# Altium PCB auto_threader.PcbDoc (part 2 of 2)
Units mil, origin at the board's own origin, x right, y up, seen from the top; angles counter-clockwise.
Board outline 1320 x 1690 mil, 4 copper layers (Signal 1, Ground, Power, Signal 2), stack 23.756 mil thick; 26 components, 26 nets, 116 pads, 98 vias.
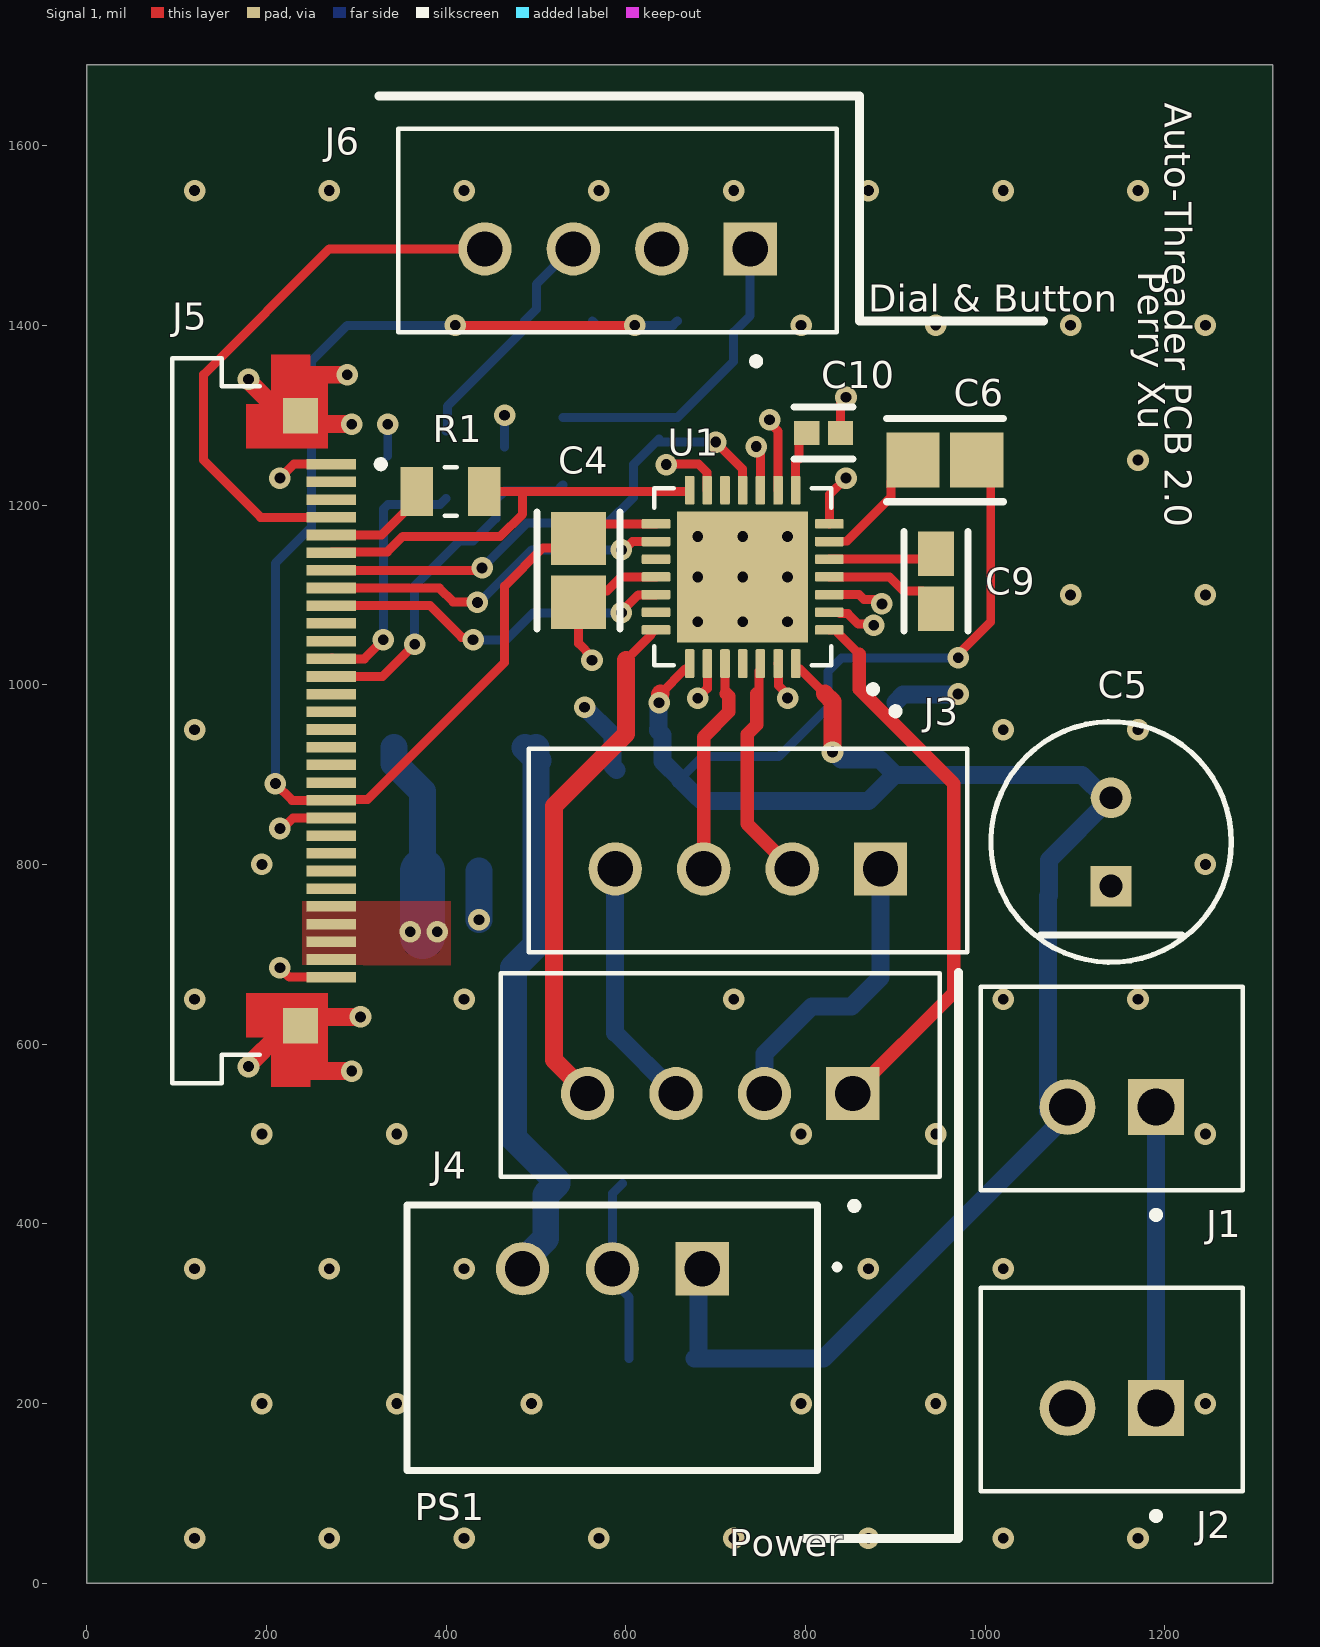
[diagram p0: Signal 1 view]

## Part data (continued)
L1: library part SRP4020TA-100M, "Ind Power Shielded Wirewound 10uH 20% 100KHz Carbonyl Powder 1.8A T/R", Case/Package=1816, Current Rating=1.8A, DC Resistance (DCR)=243mΩ, Inductance Tolerance=20%, Manufacturer=Bourns, Max Operating Temperature=150°C, Min Operating Temperature=-55°C, Ratings=AEC-Q200, Saturation Current=2.3A, Self Resonant Frequency=19MHz, Supplier Part Number=SRP4020TA-100MCT-ND, Test Frequency=100kHz, Category="Fixed Inductors", China RoHS=Compliant, ComponentLink1Description=https://datasheet.octopart.com:443/SRP4020TA-100M-Bourns-datasheet-170574725.pdf?src-supplier=HQonline, ComponentLink1URL=https://datasheet.octopart.com:443/SRP4020TA-100M-Bourns-datasheet-170574725.pdf?src-supplier=HQonline, ComponentLink2Description=https://datasheet.octopart.com:443/SRP4020TA-100M-Bourns-datasheet-57227486.pdf?src-supplier=Newark, ComponentLink2URL=https://datasheet.octopart.com:443/SRP4020TA-100M-Bourns-datasheet-57227486.pdf?src-supplier=Newark, ComponentLink3Description=https://datasheet.octopart.com:443/SRP4020TA-100M-Bourns-datasheet-27843836.pdf?src-supplier=Newark, ComponentLink3URL=https://datasheet.octopart.com:443/SRP4020TA-100M-Bourns-datasheet-27843836.pdf?src-supplier=Newark, ComponentLink4Description=https://datasheet.octopart.com:443/SRP4020TA-100M-Bourns-datasheet-154729956.pdf?src-supplier=Electro+Sonic, ComponentLink4URL=https://datasheet.octopart.com:443/SRP4020TA-100M-Bourns-datasheet-154729956.pdf?src-supplier=Electro+Sonic, ComponentLink5Description=http://sigma.octopart.com:80/conflict_mineral_statement/Bourns-company-36.pdf?src-supplier=Compliance+Statements, ComponentLink5URL=http://sigma.octopart.com:80/conflict_mineral_statement/Bourns-company-36.pdf?src-supplier=Compliance+Statements, Composition=Wirewound, Contact Plating=Tin, Core Material="Carbonyl Powder", Depth=4.06mm, Height=1.8mm, Height - Seated (Max)=2.0066mm, Length=4.45mm, Lifecycle Status=Production, Manufacturer Part Number=SRP4020TA-100M, Max Current Rating=1.8A, Max DC Current=1.8A, Mounting Technology="Surface Mount", Number of Circuits=1, Number of Terminals=2, Pins=2, Pricing="1=1.07, 10=0.88, 25=0.8136, 50=0.7672, 100=0.7233, 250=0.6692, 500=0.63098, 1000=0.59498 (USD)", Q Factor=10, REACH SVHC=Yes, RMS Current (Irms)=1.8A, RoHS=Compliant, Schedule B="8504500000, 8504500000|8504500000|8504500000|8504500000|8504500000", Shielding=Shielded, Stock=52, Supplier=DigiKey, Supplier 1=DigiKey, Supplier Part Number 1=SRP4020TA-100MCT-ND, Termination=SMD/SMT, Tolerance=20%, Width=4.06mm
R1: library part RC0805FR-071KL, "Yageo RC0805FR-071KL SMD Resistor 0603 1k Ohm ±1% Thick Film", Case Code (Imperial)=0805, Manufacturer="Yageo Group", Max Operating Temperature=155°C, Max Power Dissipation=125mW, Min Operating Temperature=-55°C, Supplier Part Number=311-1.00KCRCT-ND, Temperature Coefficient=100ppm/°C, Tolerance=1%, Voltage Rating=150V, Case/Package=0805, Category="Chip SMD Resistors", China RoHS=Non-Compliant, ComponentLink1Description=https://datasheet.octopart.com:443/RC0805FR-071KL-Yageo-datasheet-175887523.pdf?src-supplier=IHS, ComponentLink1URL=https://datasheet.octopart.com:443/RC0805FR-071KL-Yageo-datasheet-175887523.pdf?src-supplier=IHS, ComponentLink2Description=https://datasheet.octopart.com:443/RC0805FR-071KL-Yageo-datasheet-103092701.pdf?src-supplier=Upverter, ComponentLink2URL=https://datasheet.octopart.com:443/RC0805FR-071KL-Yageo-datasheet-103092701.pdf?src-supplier=Upverter, ComponentLink3Description=https://datasheet.octopart.com:443/RC0805FR-071KL-Yageo-datasheet-8330313.pdf?src-supplier=element14+APAC, ComponentLink3URL=https://datasheet.octopart.com:443/RC0805FR-071KL-Yageo-datasheet-8330313.pdf?src-supplier=element14+APAC, ComponentLink4Description=https://datasheet.octopart.com:443/RC0805FR-071KL-Yageo-datasheet-62067350.pdf?src-supplier=element14+APAC, ComponentLink4URL=https://datasheet.octopart.com:443/RC0805FR-071KL-Yageo-datasheet-62067350.pdf?src-supplier=element14+APAC, ComponentLink5Description=https://datasheet.octopart.com:443/RC0805FR-071KL-Yageo-datasheet-12592811.pdf?src-supplier=element14+APAC, ComponentLink5URL=https://datasheet.octopart.com:443/RC0805FR-071KL-Yageo-datasheet-12592811.pdf?src-supplier=element14+APAC, ComponentLink6Description=https://datasheet.octopart.com:443/RC0805FR-071KL-Yageo-Group-datasheet-190305687.pdf?src-supplier=Newark, ComponentLink6URL=https://datasheet.octopart.com:443/RC0805FR-071KL-Yageo-Group-datasheet-190305687.pdf?src-supplier=Newark, ComponentLink7Description=https://datasheet.octopart.com:443/RC0805FR-071KL-Yageo-Group-datasheet-176638170.pdf?src-supplier=Future+Electronics, ComponentLink7URL=https://datasheet.octopart.com:443/RC0805FR-071KL-Yageo-Group-datasheet-176638170.pdf?src-supplier=Future+Electronics, ComponentLink8Description=https://datasheet.octopart.com:443/RC0805FR-071KL-Yageo-datasheet-164759695.pdf?src-supplier=Future+Electronics, ComponentLink8URL=https://datasheet.octopart.com:443/RC0805FR-071KL-Yageo-datasheet-164759695.pdf?src-supplier=Future+Electronics, ComponentLink9Description=https://datasheet.octopart.com:443/RC0805FR-071KL-Yageo-datasheet-8324252.pdf?src-supplier=Future+Electronics, ComponentLink9URL=https://datasheet.octopart.com:443/RC0805FR-071KL-Yageo-datasheet-8324252.pdf?src-supplier=Future+Electronics, ComponentLink10Description=https://datasheet.octopart.com:443/RC0805FR-071KL-Yageo-datasheet-79472498.pdf?src-supplier=Megastar, ComponentLink10URL=https://datasheet.octopart.com:443/RC0805FR-071KL-Yageo-datasheet-79472498.pdf?src-supplier=Megastar, ComponentLink11Description=https://datasheet.octopart.com/RC0805FR-071KL-Yageo-datasheet-73766026.pdf, ComponentLink11URL=https://datasheet.octopart.com/RC0805FR-071KL-Yageo-datasheet-73766026.pdf, ComponentLink12Description=https://datasheet.octopart.com:443/RC0805FR-071KL-Yageo-datasheet-13691069.pdf?src-supplier=Farnell, ComponentLink12URL=https://datasheet.octopart.com:443/RC0805FR-071KL-Yageo-datasheet-13691069.pdf?src-supplier=Farnell, ComponentLink13Description=https://datasheet.octopart.com:443/RC0805FR-071KL-Yageo-datasheet-118657.pdf?src-supplier=DigiKey, ComponentLink13URL=https://datasheet.octopart.com:443/RC0805FR-071KL-Yageo-datasheet-118657.pdf?src-supplier=DigiKey, ComponentLink14Description=https://datasheet.octopart.com:443/RC0805FR-071KL-Yageo-datasheet-502840.pdf?src-supplier=element14, ComponentLink14URL=https://datasheet.octopart.com:443/RC0805FR-071KL-Yageo-datasheet-502840.pdf?src-supplier=element14, ComponentLink15Description=http://sigma.octopart.com:80/conflict_mineral_statement/Yageo-company-3.pdf?src-supplier=Compliance+Statements, ComponentLink15URL=http://sigma.octopart.com:80/conflict_mineral_statement/Yageo-company-3.pdf?src-supplier=Compliance+Statements, ComponentLink16Description=http://sigma.octopart.com:80/rohs_statement/Yageo-company-2.pdf?src-supplier=Compliance+Statements, ComponentLink16URL=http://sigma.octopart.com:80/rohs_statement/Yageo-company-2.pdf?src-supplier=Compliance+Statements, Composition="Thick Film", Contact Plating=Tin, Country of Origin="Mainland China, Taiwan", Depth=1.25mm, Export Control Classification Number (ECCN) Code=EAR99, Features="Moisture Resistant", Harmonized Tariff Schedule (HTS) Code=8533.21.00.30, Height=500µm, Introduction Date=2004-09-22, Lead Free="Lead Free", Length=2mm, Lifecycle Status=Production, Manufacturer Part Number=RC0805FR-071KL, Military Standard=Not, Mounting Technology="Surface Mount", Number of Terminals=2, Number of Terminations=2, Packaging="Tape & Reel", Pins=2, Power Rating=125mW, Pricing="1=0.1, 10=0.034, 25=0.0256, 50=0.0208, 100=0.0171, 250=0.01344, 500=0.01136, 1000=0.00973 (USD)", Radiation Hardening=No, REACH SVHC=Yes, RoHS=Compliant, Schedule B="8533210045, 8533210045|8533210045, 8533210045|8533210045|8533210045, 8533210045|8533210045|8533210045|8533210045", Stock=169387, Supplier=DigiKey, Supplier 1=DigiKey, Supplier Part Number 1=311-1.00KCRCT-ND, Termination=SMD/SMT, Voltage Rating (AC)=150V, Voltage Rating (DC)=150V, Width=1.25mm, Working Voltage=150V
R2 R3: library part RC0805FR-0710KL, "Res General Purpose Thick Film 0805 10k Ohm 1% 1/8W ±100ppm/°C Ceramic Paper T/R", Case Code (Imperial)=0805, Manufacturer="Yageo Group", Max Operating Temperature=155°C, Max Power Dissipation=125mW, Min Operating Temperature=-55°C, Supplier Part Number=311-10.0KCRDKR-ND, Temperature Coefficient=100ppm/°C, Tolerance=1%, Voltage Rating=150V, Case/Package=0805, Category="Chip SMD Resistors", China RoHS=Non-Compliant, ComponentLink1Description=https://datasheet.octopart.com:443/RC0805FR-0710KL-Yageo-datasheet-175887523.pdf?src-supplier=Newark, ComponentLink1URL=https://datasheet.octopart.com:443/RC0805FR-0710KL-Yageo-datasheet-175887523.pdf?src-supplier=Newark, ComponentLink2Description=https://datasheet.octopart.com:443/RC0805FR-0710KL-Yageo-datasheet-62067350.pdf?src-supplier=Farnell, ComponentLink2URL=https://datasheet.octopart.com:443/RC0805FR-0710KL-Yageo-datasheet-62067350.pdf?src-supplier=Farnell, ComponentLink3Description=https://datasheet.octopart.com:443/RC0805FR-0710KL-Yageo-datasheet-13691069.pdf?src-supplier=Farnell, ComponentLink3URL=https://datasheet.octopart.com:443/RC0805FR-0710KL-Yageo-datasheet-13691069.pdf?src-supplier=Farnell, ComponentLink4Description=https://datasheet.octopart.com:443/RC0805FR-0710KL-Yageo-datasheet-103092701.pdf?src-supplier=Upverter, ComponentLink4URL=https://datasheet.octopart.com:443/RC0805FR-0710KL-Yageo-datasheet-103092701.pdf?src-supplier=Upverter, ComponentLink5Description=https://datasheet.octopart.com:443/RC0805FR-0710KL-Yageo-datasheet-98239111.pdf?src-supplier=Upverter, ComponentLink5URL=https://datasheet.octopart.com:443/RC0805FR-0710KL-Yageo-datasheet-98239111.pdf?src-supplier=Upverter, ComponentLink6Description=https://datasheet.octopart.com:443/RC0805FR-0710KL-Yageo---Phycomp-datasheet-67302840.pdf?src-supplier=Upverter, ComponentLink6URL=https://datasheet.octopart.com:443/RC0805FR-0710KL-Yageo---Phycomp-datasheet-67302840.pdf?src-supplier=Upverter, ComponentLink7Description=https://datasheet.octopart.com:443/RC0805FR-0710KL-Yageo-datasheet-8330313.pdf?src-supplier=element14+APAC, ComponentLink7URL=https://datasheet.octopart.com:443/RC0805FR-0710KL-Yageo-datasheet-8330313.pdf?src-supplier=element14+APAC, ComponentLink8Description=https://datasheet.octopart.com:443/RC0805FR-0710KL-Yageo-datasheet-12592811.pdf?src-supplier=element14+APAC, ComponentLink8URL=https://datasheet.octopart.com:443/RC0805FR-0710KL-Yageo-datasheet-12592811.pdf?src-supplier=element14+APAC, ComponentLink9Description=https://datasheet.octopart.com:443/RC0805FR-0710KL-Yageo-Group-datasheet-190305687.pdf?src-supplier=Future+Electronics, ComponentLink9URL=https://datasheet.octopart.com:443/RC0805FR-0710KL-Yageo-Group-datasheet-190305687.pdf?src-supplier=Future+Electronics, ComponentLink10Description=https://datasheet.octopart.com:443/RC0805FR-0710KL-Yageo-datasheet-164759695.pdf?src-supplier=Future+Electronics, ComponentLink10URL=https://datasheet.octopart.com:443/RC0805FR-0710KL-Yageo-datasheet-164759695.pdf?src-supplier=Future+Electronics, ComponentLink11Description=https://datasheet.octopart.com:443/RC0805FR-0710KL-Yageo-datasheet-15800360.pdf?src-supplier=Future+Electronics, ComponentLink11URL=https://datasheet.octopart.com:443/RC0805FR-0710KL-Yageo-datasheet-15800360.pdf?src-supplier=Future+Electronics, ComponentLink12Description=https://datasheet.octopart.com:443/RC0805FR-0710KL-Yageo-datasheet-8324252.pdf?src-supplier=Future+Electronics, ComponentLink12URL=https://datasheet.octopart.com:443/RC0805FR-0710KL-Yageo-datasheet-8324252.pdf?src-supplier=Future+Electronics, ComponentLink13Description=https://datasheet.octopart.com:443/RC0805FR-0710KL-Yageo-datasheet-79472498.pdf?src-supplier=Megastar, ComponentLink13URL=https://datasheet.octopart.com:443/RC0805FR-0710KL-Yageo-datasheet-79472498.pdf?src-supplier=Megastar, ComponentLink14Description=https://datasheet.octopart.com:443/RC0805FR-0710KL-Yageo-datasheet-27714392.pdf?src-supplier=Seeed+Studio, ComponentLink14URL=https://datasheet.octopart.com:443/RC0805FR-0710KL-Yageo-datasheet-27714392.pdf?src-supplier=Seeed+Studio, ComponentLink15Description=https://datasheet.octopart.com/RC0805FR-0710KL-Yageo-datasheet-73766026.pdf, ComponentLink15URL=https://datasheet.octopart.com/RC0805FR-0710KL-Yageo-datasheet-73766026.pdf, ComponentLink16Description=https://datasheet.octopart.com:443/RC0805FR-0710KL-Yageo-datasheet-118657.pdf?src-supplier=DigiKey, ComponentLink16URL=https://datasheet.octopart.com:443/RC0805FR-0710KL-Yageo-datasheet-118657.pdf?src-supplier=DigiKey, ComponentLink17Description=https://datasheet.octopart.com:443/RC0805FR-0710KL-Yageo-datasheet-502840.pdf?src-supplier=element14, ComponentLink17URL=https://datasheet.octopart.com:443/RC0805FR-0710KL-Yageo-datasheet-502840.pdf?src-supplier=element14, ComponentLink18Description=http://sigma.octopart.com:80/conflict_mineral_statement/Yageo-company-3.pdf?src-supplier=Compliance+Statements, ComponentLink18URL=http://sigma.octopart.com:80/conflict_mineral_statement/Yageo-company-3.pdf?src-supplier=Compliance+Statements, ComponentLink19Description=http://sigma.octopart.com:80/rohs_statement/Yageo-company-2.pdf?src-supplier=Compliance+Statements, ComponentLink19URL=http://sigma.octopart.com:80/rohs_statement/Yageo-company-2.pdf?src-supplier=Compliance+Statements, Composition="Thick Film", Contact Plating=Tin, Country of Origin="Mainland China, Taiwan", Depth=1.25mm, Export Control Classification Number (ECCN) Code=EAR99, Features="Moisture Resistant", Harmonized Tariff Schedule (HTS) Code=8533.21.00.30, Height=500µm, Introduction Date=2004-09-22, Lead Free="Lead Free", Length=2mm, Lifecycle Status=Production, Manufacturer Part Number=RC0805FR-0710KL, Military Standard=Not, Mounting Technology="Surface Mount", Number of Terminals=2, Number of Terminations=2, Packaging="Tape and Reel", Pins=2, Power Rating=125mW, Pricing="1=0.1, 10=0.034, 25=0.0256, 50=0.0208, 100=0.0171, 250=0.01344, 500=0.01136, 1000=0.00973 (USD)", Radiation Hardening=No, REACH SVHC=Yes, RoHS=Compliant, Schedule B="8533210045, 8533210045|8533210045|8533210045|8533210045|8533210045|8533210045|8533210045|8533210045|8533210045|8533210045|8533210045|8533210045|8533210045|8533210045|8533210045|8533210045|8533210045|8533210045|8533210045|8533210045|8533210045|8533210045|8533210045|85", Stock=2901046, Supplier=DigiKey, Supplier 1=DigiKey, Supplier Part Number 1=311-10.0KCRDKR-ND, Termination=SMD/SMT, Voltage Rating (AC)=150V, Voltage Rating (DC)=150V, Width=1.25mm, Working Voltage=150V
R4 R5: library part RC0805FR-0710KL, "Res General Purpose Thick Film 0805 10k Ohm 1% 1/8W ±100ppm/°C Ceramic Paper T/R", Max Operating Temperature=155°C, Manufacturer="Yageo Group", Max Power Dissipation=125mW, Min Operating Temperature=-55°C, Voltage Rating (DC)=150V, Tolerance=1%, Temperature Coefficient=100ppm/°C, Supplier Part Number 1=311-10.0KCRDKR-ND, Case/Package=0805, Manufacturer Part Number=RC0805FR-0710KL, ComponentLink16Description=https://datasheet.octopart.com:443/RC0805FR-0710KL-Yageo-datasheet-118657.pdf?src-supplier=DigiKey, Lifecycle Status=Production, Mounting Technology="Surface Mount", Military Standard=Not, Length=2mm, Depth=1.25mm, Introduction Date=2004-09-22, Height=500µm, Harmonized Tariff Schedule (HTS) Code=8533.21.00.30, Features="Moisture Resistant", Export Control Classification Number (ECCN) Code=EAR99, Number of Terminals=2, Country of Origin="Mainland China, Taiwan", Contact Plating=Tin, Lead Free="Lead Free", Number of Terminations=2, RoHS=Compliant, Pins=2, Voltage Rating (AC)=150V, Voltage Rating=150V, Termination=SMD/SMT, Packaging="Tape and Reel", Supplier Part Number=311-10.0KCRDKR-ND, Supplier=DigiKey, Stock=2901046, Schedule B="8533210045, 8533210045|8533210045|8533210045|8533210045|8533210045|8533210045|8533210045|8533210045|8533210045|8533210045|8533210045|8533210045|8533210045|8533210045|8533210045|8533210045|8533210045|8533210045|8533210045|8533210045|8533210045|8533210045|8533210045|85", Composition="Thick Film", REACH SVHC=Yes, Radiation Hardening=No, Pricing="1=0.1, 10=0.034, 25=0.0256, 50=0.0208, 100=0.0171, 250=0.01344, 500=0.01136, 1000=0.00973 (USD)", Power Rating=125mW, Supplier 1=DigiKey, ComponentLink19URL=http://sigma.octopart.com:80/rohs_statement/Yageo-company-2.pdf?src-supplier=Compliance+Statements, Working Voltage=150V, ComponentLink18URL=http://sigma.octopart.com:80/conflict_mineral_statement/Yageo-company-3.pdf?src-supplier=Compliance+Statements, ComponentLink7Description=https://datasheet.octopart.com:443/RC0805FR-0710KL-Yageo-datasheet-8330313.pdf?src-supplier=element14+APAC, ComponentLink6URL=https://datasheet.octopart.com:443/RC0805FR-0710KL-Yageo---Phycomp-datasheet-67302840.pdf?src-supplier=Upverter, ComponentLink6Description=https://datasheet.octopart.com:443/RC0805FR-0710KL-Yageo---Phycomp-datasheet-67302840.pdf?src-supplier=Upverter, ComponentLink5URL=https://datasheet.octopart.com:443/RC0805FR-0710KL-Yageo-datasheet-98239111.pdf?src-supplier=Upverter, ComponentLink5Description=https://datasheet.octopart.com:443/RC0805FR-0710KL-Yageo-datasheet-98239111.pdf?src-supplier=Upverter, ComponentLink4URL=https://datasheet.octopart.com:443/RC0805FR-0710KL-Yageo-datasheet-103092701.pdf?src-supplier=Upverter, ComponentLink4Description=https://datasheet.octopart.com:443/RC0805FR-0710KL-Yageo-datasheet-103092701.pdf?src-supplier=Upverter, ComponentLink3URL=https://datasheet.octopart.com:443/RC0805FR-0710KL-Yageo-datasheet-13691069.pdf?src-supplier=Farnell, ComponentLink3Description=https://datasheet.octopart.com:443/RC0805FR-0710KL-Yageo-datasheet-13691069.pdf?src-supplier=Farnell, ComponentLink2URL=https://datasheet.octopart.com:443/RC0805FR-0710KL-Yageo-datasheet-62067350.pdf?src-supplier=Farnell, ComponentLink2Description=https://datasheet.octopart.com:443/RC0805FR-0710KL-Yageo-datasheet-62067350.pdf?src-supplier=Farnell, ComponentLink1URL=https://datasheet.octopart.com:443/RC0805FR-0710KL-Yageo-datasheet-175887523.pdf?src-supplier=Newark, ComponentLink1Description=https://datasheet.octopart.com:443/RC0805FR-0710KL-Yageo-datasheet-175887523.pdf?src-supplier=Newark, China RoHS=Non-Compliant, Category="Chip SMD Resistors", Case Code (Imperial)=0805, ComponentLink7URL=https://datasheet.octopart.com:443/RC0805FR-0710KL-Yageo-datasheet-8330313.pdf?src-supplier=element14+APAC, ComponentLink19Description=http://sigma.octopart.com:80/rohs_statement/Yageo-company-2.pdf?src-supplier=Compliance+Statements, ComponentLink8Description=https://datasheet.octopart.com:443/RC0805FR-0710KL-Yageo-datasheet-12592811.pdf?src-supplier=element14+APAC, ComponentLink9Description=https://datasheet.octopart.com:443/RC0805FR-0710KL-Yageo-Group-datasheet-190305687.pdf?src-supplier=Future+Electronics, ComponentLink18Description=http://sigma.octopart.com:80/conflict_mineral_statement/Yageo-company-3.pdf?src-supplier=Compliance+Statements, ComponentLink17URL=https://datasheet.octopart.com:443/RC0805FR-0710KL-Yageo-datasheet-502840.pdf?src-supplier=element14, ComponentLink17Description=https://datasheet.octopart.com:443/RC0805FR-0710KL-Yageo-datasheet-502840.pdf?src-supplier=element14, ComponentLink16URL=https://datasheet.octopart.com:443/RC0805FR-0710KL-Yageo-datasheet-118657.pdf?src-supplier=DigiKey, Width=1.25mm, ComponentLink15URL=https://datasheet.octopart.com/RC0805FR-0710KL-Yageo-datasheet-73766026.pdf, ComponentLink15Description=https://datasheet.octopart.com/RC0805FR-0710KL-Yageo-datasheet-73766026.pdf, ComponentLink14URL=https://datasheet.octopart.com:443/RC0805FR-0710KL-Yageo-datasheet-27714392.pdf?src-supplier=Seeed+Studio, ComponentLink8URL=https://datasheet.octopart.com:443/RC0805FR-0710KL-Yageo-datasheet-12592811.pdf?src-supplier=element14+APAC, ComponentLink14Description=https://datasheet.octopart.com:443/RC0805FR-0710KL-Yageo-datasheet-27714392.pdf?src-supplier=Seeed+Studio, ComponentLink13Description=https://datasheet.octopart.com:443/RC0805FR-0710KL-Yageo-datasheet-79472498.pdf?src-supplier=Megastar, ComponentLink12URL=https://datasheet.octopart.com:443/RC0805FR-0710KL-Yageo-datasheet-8324252.pdf?src-supplier=Future+Electronics, ComponentLink12Description=https://datasheet.octopart.com:443/RC0805FR-0710KL-Yageo-datasheet-8324252.pdf?src-supplier=Future+Electronics, ComponentLink11URL=https://datasheet.octopart.com:443/RC0805FR-0710KL-Yageo-datasheet-15800360.pdf?src-supplier=Future+Electronics, ComponentLink11Description=https://datasheet.octopart.com:443/RC0805FR-0710KL-Yageo-datasheet-15800360.pdf?src-supplier=Future+Electronics, ComponentLink10URL=https://datasheet.octopart.com:443/RC0805FR-0710KL-Yageo-datasheet-164759695.pdf?src-supplier=Future+Electronics, ComponentLink10Description=https://datasheet.octopart.com:443/RC0805FR-0710KL-Yageo-datasheet-164759695.pdf?src-supplier=Future+Electronics, ComponentLink9URL=https://datasheet.octopart.com:443/RC0805FR-0710KL-Yageo-Group-datasheet-190305687.pdf?src-supplier=Future+Electronics, ComponentLink13URL=https://datasheet.octopart.com:443/RC0805FR-0710KL-Yageo-datasheet-79472498.pdf?src-supplier=Megastar
U1: Supplier Part Number 1=505-TMC2209-LA-ND, Supplier 1=DigiKey

## Via types
v1: diameter 24, hole 12, Signal 1 to Signal 2, tented both sides, 89 vias
v2: diameter 20, hole 12, Signal 1 to Signal 2, tented both sides, 9 vias

## Nets (pads, with @x,y where several pads share a name; then routed paths per layer and width w, separated by ;. In a path a pad name is that pad's centre, name@x,y a point inside that pad or via, vN(x,y) a via of type N, cw(c..) or ccw(c..) an arc to the next point about the centre after c; other vN are vias at no path point)
3.3V: C4.1 J5.20 R4.2 R5.2 U1.15 | length 1586.7
  Signal 1 w10: v1(210,890) 228.58,871.42 J5.20 272.91,872.2 312.2,872.2 465,1025 465,1109.64 507.53,1152.18 536.71,1152.18 C4.1 ; v1(410,1400) v1(610,1400) ; C4.1@536.02,1150.46 547.82,1162.27 564.61,1179.05 U1.15
  Signal 2 w10: v1(210,890) 210,1135 250,1175 250,1360 290,1400 v1(410,1400) ; R5.2 567.6,1400 v1(610,1400) 652.4,1400 R4.2
5V: C3.1 J5.26 J5.27 J5.28 J5.29 L1.2 | length 223
  Signal 2 w30: L1.2 342.17,912.28 373.51,880.94 C3.1
  Signal 2 w50: 373.51,720 C3.1
  other v1: 360,725 390,725
5VOUT: C10.1 U1.8 | length 68.7
  Signal 1 w10: U1.8 789.06,1248.07 792.75,1251.76 792.75,1255 792.75,1271.76 800.98,1280 C10.1
B_SELECT: J5.4 J6.4 | length 634.6
  Signal 1 w10: J5.4 193.62,1186.38 130,1250 130,1345 270,1485 J6.4
CHANNEL_A: C11.1 J5.12 R2.1 | length 288.1
  Signal 1 w10: J5.12@272.91,1029.68 J5.12 308.9,1028.9 v1(330,1050)
  Signal 2 w10: v1(330,1050) 330,1195.39 C11.1 392.99,1200.39 R2.1
CHANNEL_B: C12.1 J5.13 R3.1 | length 396.2
  Signal 1 w10: J5.13 329.21,1009.21 v1(365,1045)
  Signal 2 w10: v1(365,1045) 365,1110 415,1160 430,1160 455.24,1185.24 455.24,1205.63 C12.1 522.99,1215.39 R3.1
DIAG: J5.7 U1.11 | length 579.1
  Signal 1 w10: J5.7 437.32,1127.32 v1(440,1130) ; v1(700,1270) 729.68,1240.32 729.68,1216.77 U1.11
  Signal 2 w10: v1(440,1130) 490,1180 580,1180 608.34,1208.34 608.34,1244.97 633.38,1270 ; 636.69,1273.31 633.38,1270 ; v1(700,1270) 633.38,1270
DIR: J5.9 U1.19 | length 398.7
  Signal 1 w10: J5.9 382.05,1087.95 417.32,1052.68 427.32,1052.68 v1(430,1050) ; v1(595,1080) 595,1081.21 613.79,1100 633.23,1100 U1.19
  Signal 2 w10: v1(430,1050) 466.77,1050 496.77,1080 v1(595,1080)
GND: C1.2 C2.2 C3.2 C4.2 C5.1 C7.2 C8.2 C10.2 C11.2 C12.2 J2.2 J5.1 J5.21 J5.30 J5.SH1 J5.SH2 J6.2 PS1.2 U1.2 U1.3 U1.7 U1.9 U1.10 U1.13 U1.18 U1.23 U1.27 U1.29 | length 1804.2
  Signal 1 w10: v1(215,685) 225.43,674.57 J5.30 ; v1(215,840) 217.83,840 229.57,851.73 J5.21 ; v1(215,1230) 230.43,1245.43 J5.1 ; C4.2@535,1079.54 C4.2@559.62,1104.15 ; v1(562.31,1027.31) 562.31,1031.1 547.31,1046.1 C4.2 C4.2@559.62,1104.15 ; U1.18 594.64,1120 578.8,1104.15 C4.2@559.62,1104.15 ; v1(645,1245) 645.4,1245.4 680.87,1245.4 690.31,1235.95 690.31,1216.77 U1.13 ; v1(680,985) 680,985.23 690.63,995.86 U1.23 ; v1(745,1265) 749.68,1260.32 U1.10 ; v1(760,1295) 760,1291.21 769.37,1281.84 U1.9 ; U1.27 769.68,1023.23 769.68,999.28 780,988.97 v1(780,985.18) ; U1.2 826.77,1080.31 837.4,1080.31 838.46,1079.26 847.01,1079.26 858.79,1067.47 874.5,1067.47 v1(875.81,1066.16) ; U1.3 859.68,1100.31 865,1095 878.92,1095 v1@883.15,1090.77 ; U1.7 826.46,1211.46 v1(845,1230) ; C10.2 838.84,1313.84 v1(845,1320)
  Signal 1 w20: v1(180,575) 180,576.65 214.29,610.94 228.19,610.94 247.56,630.31 v1(304.69,630.31) ; v1(180,1340) 180,1338.35 205.94,1312.4 205.94,1309.06 228.19,1309.06 J5.SH1 247.24,1290 v1(295,1290) ; 225,570 v1(295,570) ; 230,1345 v1(290,1345) ; v1@883.15,1090.77 v1@884.23,1090.77
  Signal 2 w10: C11.2@335,1254.61 v1(335,1290) ; C12.2 v1(465,1300) ; C2.2 585,433.53 PS1.2 585,336.73 603.55,318.17 C1.2
  Signal 2 w20: v1(554.07,975) 585.16,943.92 585.16,909.38 C7.2@589.54,905 ; C8.2@900,980.46 908.47,988.94 968.94,988.94 v1(969.7,989.7)
  Signal 2 w30: v1(436.55,738.45) C3.2
  other v1: 120,50 270,50 420,50 570,50 720,50 870,50 1020,50 1170,50 195,200 345,200 495,200 795,200 945,200 1245,200 120,350 270,350 420,350 870,350 1020,350 195,500 345,500 795,500 945,500 1245,500 120,650 420,650 720,650 1020,650 1170,650 195,800 1245,800 120,950 1020,950 1170,950 885,1090 1095,1100 1245,1100 1170,1250 795,1400 945,1400 1095,1400 1245,1400 120,1550 270,1550 420,1550 570,1550 720,1550 870,1550 1020,1550 1170,1550
  other v2: 680,1070 730,1070 780,1070 680,1120 730,1120 780,1120 680,1165 730,1165 780,1165
M1: J3.3 U1.24 | length 238.5
  Signal 1 w10: U1.24@710.63,1020.1 710.31,1019.78 710.31,991.37 711.68,990
  Signal 1 w15: J3.3 686.57,941.82 714.5,969.75 714.5,987.18 711.68,990
M2: J4.4 U1.21 | length 579.2
  Signal 1 w10: 600,1027.4 627.6,1055 627.6,1056.26 632.28,1060.94 U1.21
  Signal 1 w20: J4.4 520,582.36 520,865 600,945 600,1027.4
M2I: J3.4 J4.3 | length 278
  Signal 2 w20: J3.4 588.15,612.64 J4.3
M3: J3.2 U1.26 | length 246.3
  Signal 1 w10: 745.5,990 748.31,992.81 U1.26@748.31,1015.1
  Signal 1 w15: 745.5,990 745.5,955.5 735,945 735,845 J3.2
M4: J4.1 U1.1 | length 623.5
  Signal 1 w10: U1.1 832.72,1060.94 860,1033.66
  Signal 1 w15: J4.1 965,657.36 965,890 860,995 860,1033.66
M4I: J3.1 J4.2 | length 329.4
  Signal 2 w20: J4.2 754.31,545.1 754.31,589.31 806.91,641.91 851.12,641.91 883.43,674.21 J3.1
NetC2_1: C2.1 L1.1 PS1.3 | length 647
  Signal 2 w30: PS1.3 485,357.86 510.86,383.72 510.86,432.33 C2.1 523.53,447.02 475,495.55 475,685 500,710 L1.1@500,917.83 ; L1.1 L1.1@500,917.83 ; L1.1@500,930 L1.1@500,917.83 ; L1.1@502.36,915.47 L1.1@500,917.83
NetC6_2: C6.2 U1.6 | length 140.4
  Signal 1 w10: U1.6 826.77,1159.68 845.95,1159.68 894.92,1208.65 894.92,1225.38 C6.2
NetC9_1: C9.1 U1.5 | length 121
  Signal 1 w10: U1.5 864.68,1139.68 865,1140 939.41,1140 C9.1
NetC9_2: C9.2 U1.4 | length 136.1
  Signal 1 w10: U1.4 893.18,1120 909.01,1104.18 930.08,1104.18 945,1089.25 C9.2
NetJ1_1: J1.1 J2.1 | length 335
  Signal 2 w20: J2.1 J1.1
NetJ6_1: J6.1 R3.2 R4.1 | length 352.2
  Signal 2 w10: R3.2 657.6,1297.6 720,1360 720,1392.4 R4.1 738.43,1410.83 J6.1 ; J6.1@737.4,1483.98 J6.1 ; J6.1@740,1483.43 J6.1
NetJ6_3: J6.3 R2.2 R5.1 | length 262
  Signal 2 w10: R2.2 401.31,1283.91 401.31,1309.85 487.4,1395.94 R5.1 500.51,1418.11 500.51,1445.51 540,1485 J6.3
RX: J5.6 R1.2 U1.14 | length 485.3
  Signal 1 w10: J5.6 272.91,1147.79 334.7,1147.79 351.91,1165 460,1165 485,1190 485,1215 ; R1.2 485,1215 ; U1.14 670.94,1215.32 670.63,1215 485,1215
STEP: J5.8 U1.16 | length 396.2
  Signal 1 w10: J5.8 392.36,1107.64 407.74,1092.26 434.04,1092.26 v1(434.74,1091.56) ; v1(595,1150) 597.95,1150 607.33,1159.37 U1.16
  Signal 2 w10: v1(434.74,1091.56) 436.92,1091.56 495.36,1150 v1(595,1150)
TX: J5.5 R1.1 | length 120.6
  Signal 1 w10: J5.5 328.15,1166.69 367.4,1205.94 R1.1
VMOT: C1.1 C5.2 C6.1 C7.1 C8.1 J1.2 PS1.1 U1.22 U1.28 | length 2487.2
  Signal 1 w10: v1@638.66,990 U1.22@666.26,1017.6 ; U1.28@793.74,1017.6 821.34,990 ; v1(970,1030) 970,1033.79 1006.1,1069.89 C6.1@1006.1,1230.46
  Signal 1 w20: v1(637,980) 637.77,980.77 637.77,989.1 v1@638.66,990 ; 821.34,990 830,981.34 v1(830,925) ; C6.1 C6.1@1009.23,1231.23
  Signal 2 w10: C7.1 660.46,895.38 685.08,920 770,920 825,975 825,1015 840,1030 v1(970,1030)
  Signal 2 w20: v1(637,980) 636.23,979.23 636.23,951.1 635.77,950.63 635.77,949.23 640.85,944.15 640.85,914.62 C7.1 660.46,893.98 680.08,874.37 681.1,874.37 684.91,870.55 870,870.55 898.98,899.54 C8.1 ; C1.1 820,250 1091.57,521.57 J1.2 ; C1.1@680.72,256.28 680.72,345.72 PS1.1 ; v1(830,925) 831.08,925 839.37,916.72 882.82,916.72 C8.1 ; J1.2@1070,525 1070,764.61 1070.79,765.4 1070.79,805 C5.2 1133.16,874.21 1107.84,899.54 1003.92,899.54 C8.1
pads on no net: J5.2 J5.3 J5.10 J5.11 J5.14 J5.15 J5.16 J5.17 J5.18 J5.19 J5.22 J5.23 J5.24 J5.25 U1.12 U1.17 U1.20 U1.25

## Polygon pours and split planes (outlines as drawn)
5V on Signal 1 "5V_L01_P001" (solid, remove dead copper, pour order 1): 240,759 405,759 405,688 240,688
GND on Ground "GND_L02_P000" (solid, remove dead copper, pour order 0): 20,20 20,1670 1300,1670 1300,20
GND on Power "GND_L03_P002" (solid, remove dead copper, pour order 2): 20,20 20,1670 1300,1670 1300,20

## Silkscreen, mask and mechanical layers (free items; w line width, h text height)
Top Overlay:
  lines w10: 325,1655 860,1655 860,1405 1065,1405 ; 800,50 970,50 970,680
  text "Auto-Threader PCB 2.0" at 1200.01,1647.44 h30 r270
  text "Perry Xu" at 1170,1460 h30 r270
  text "Dial & Button" at 870,1415 h30
  text "Power" at 715.05,30.01 h30
Mechanical 1:
  the board outline again, w10